# Altium PCB AOP6432.PcbDoc (part 2 of 3)
Units mm, origin at the board's own origin, x right, y up, seen from the top; angles counter-clockwise.
Board outline 64.05 x 39.02 mm, 4 copper layers (Top Layer, Layer 1, Layer 2, Bottom Layer), stack 1.52 mm thick; 112 components, 77 nets, 423 pads, 19 vias.
Unrouted connection lines stored in the file: 2.
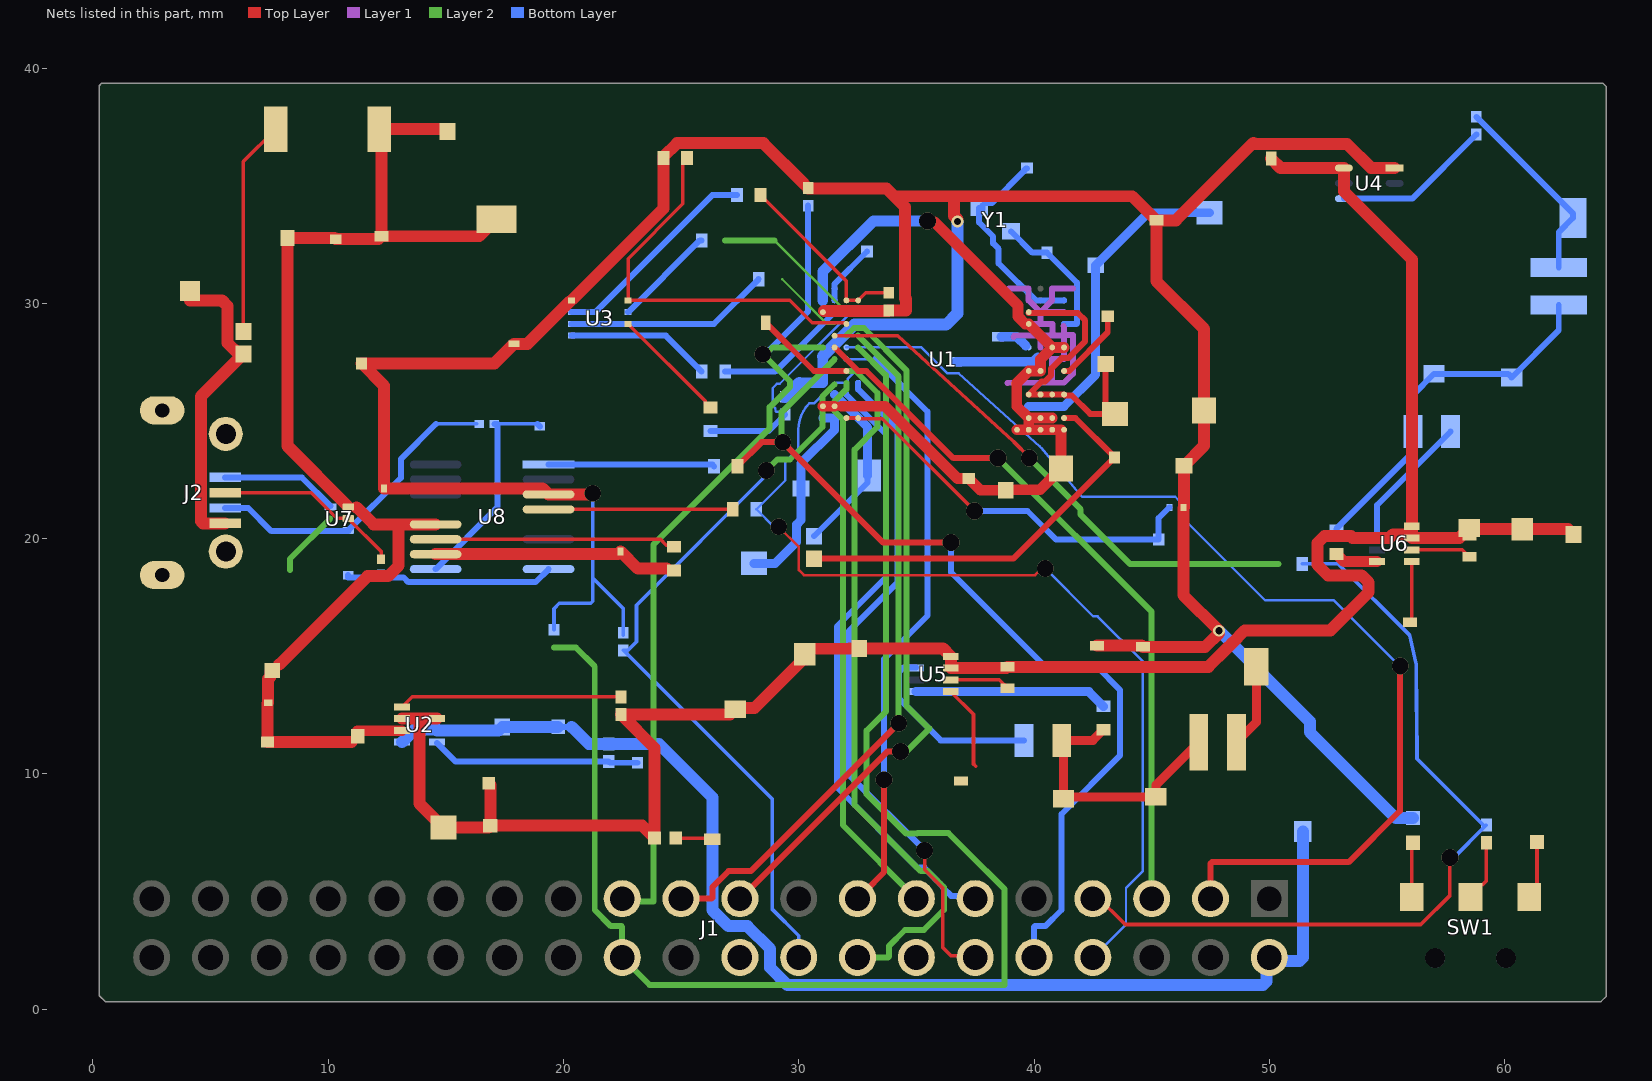
[diagram p4: the nets of this part, all layers, seen from the top]

## Part data (continued)
C25: library part CMP-06035-036920-1, "Chip Multilayer Ceramic Capacitors for General Purpose, 0603, 10uF, X7R, 15%, 20%, 10V", Case/Package=0603
C28 C44 C47 C48 C50 C53 C54: library part CMP-06035-002932-1, "Chip Multilayer Ceramic Capacitors for General Purpose, 0603, 10uF, X6S, 22%, 20%, 10V", Capacitance=10uF, Case Code (Imperial)=0603, Case Code (Metric)=1608, Dielectric=X6S, Max Operating Temperature=105°C, Min Operating Temperature=-55°C, Package Quantity=4000, Tolerance=20%, Voltage Rating=10V, Case/Package=0603, Height=0.8mm, Lead Free="Lead Free", Length=0.063inch, Material=Ceramic, Mount="Surface Mount", Packaging="Cut Tape", REACH SVHC="No SVHC", Thickness=0.031inch, Voltage Rating (DC)=10V, Width=0.031inch
C29: library part CMP-06035-045859-1, "Multi-Layer Ceramic Capacitor 10uF 10V X5R ±10% 0603 Paper T/R", Capacitance=10uF, Case Code (Imperial)=0603, Case Code (Metric)=1608, Max Operating Temperature=85°C, Min Operating Temperature=-55°C, Ratings=AEC-Q200, Tolerance=10%, Voltage Rating=10V, Case/Package=0603, Length=0.063inch, Mount="Surface Mount", Packaging="Cut Tape", Thickness=0.035inch, Width=0.031inch
C30: library part CMP-06035-037205-1, "Ceramic Capacitor for Automotive 470nF ±20% 10VDC X7S 0402 Paper T/R", Capacitance=0.47uF
C31: library part CMP-06035-016531-1, "Ceramic Capacitor for Automotive 220nF ±10% 16VDC X7R 0402 Paper T/R", Capacitance=0.22uF, Case Code (Imperial)=0402, Case Code (Metric)=1005, Dielectric=X7R, Max Operating Temperature=125°C, Min Operating Temperature=-55°C, Package Quantity=10000, Ratings=AEC-Q200, Tolerance=10%, Voltage Rating=16V, Case/Package=0402, Height=0.5mm, Lead Free="Lead Free", Length=0.039inch, Mount="Surface Mount", Packaging="Tape and Reel", Termination=SMD/SMT, Thickness=0.022inch, Voltage Rating (DC)=16V, Weight=0.000212oz, Width=0.5mm
C32: library part CMP-00260-135863763-1, Capacitance=10µF, Case/Package=0402, Dielectric=X5R, Max Operating Temperature=85°C, Min Operating Temperature=-55°C, Tolerance=20%, Voltage Rating=10V, Height=700µm, Length=1mm, Lifecycle Status=Production, Material=Ceramic, NexarPartId=135863763, Thickness=500µm, Voltage Rating (DC)=10V, Width=500µm
C33: library part CMP-2000-05255-3, "Chip Multilayer Ceramic Capacitors for General Purpose, 1206, 47uF, X5R, 15%, 20%, 10V", Capacitance=47uF, Case Code (Imperial)=1206, Case Code (Metric)=3216, Dielectric=X5R, Max Operating Temperature=85°C, Min Operating Temperature=-55°C, Package Quantity=2000, Tolerance=20%, Voltage=10V, Case/Package=1206, Depth=1.6mm, Height=1.6mm, Lead Free="Lead Free", Length=3.2mm, Mount="Surface Mount", Number of Pins=2, Packaging="Tape and Reel", Radiation Hardening=No, REACH SVHC="No SVHC", Termination=SMD/SMT, Thickness=0.071inch, Voltage Rating=10V, Voltage Rating (DC)=10V, Width=1.6mm
C34 C36 C38: library part CMP-06035-002210-1, "Chip Multilayer Ceramic Capacitors for General Purpose, 0201, 0.10uF, X5R, 15%, 20%, 16V", Capacitance=0.1uF, Dielectric=X5R, Tolerance=20%, Voltage Rating (DC)=16V, Length=600um, Thickness=300um, Width=300um
C35: "Multilayer Ceramic Capacitors MLCC - SMD/SMT 10V 10uF X5R 0402 20% Tol", Capacitance=10uF, Manufacturer_Name="Kyocera AVX", Mouser Part Number=581-0402ZD106MAT2A, Voltage=10V, Arrow Part Number=0402ZD106MAT2A, Arrow Price/Stock=https://www.arrow.com/en/products/0402zd106mat2a/avx?utm_currency=USD&region=nac, Datasheet Link=http://www.mouser.com/catalog/supplier/library/pdf/AVXSurfaceMountCeramic.pdf, Geometry.Height=0.56mm, Manufacturer_Part_Number=0402ZD106MAT2A, Mouser Price/Stock=https://www.mouser.co.uk/ProductDetail/KYOCERA-AVX/0402ZD106MAT2A?qs=sJ5gq5MLFXpDfmjiItAxIg%3D%3D
C37: library part CMP-1033-00635-3, "Chip Multilayer Ceramic Capacitors for General Purpose, 0201, 10000pF, X7R, 15%, 10%, 6.3V", Capacitance=0.01uF, Case Code (Imperial)=0201, Case Code (Metric)=0603, Dielectric=X7R, Max Operating Temperature=125°C, Min Operating Temperature=-55°C, Package Quantity=15000, Tolerance=10%, Voltage=6.3V, Case/Package=0201, Depth=0.3mm, Height=0.3mm, Lead Free="Lead Free", Length=0.6mm, Mount="Surface Mount", Packaging="Tape and Reel", Radiation Hardening=No, REACH SVHC="No SVHC", Termination=SMD/SMT, Thickness=0.013inch, Voltage Rating=6.3V, Voltage Rating (DC)=6.3V, Width=0.012inch
C40: library part CMP-08246-004330-1, "CAP CER 0.1UF 50V X7R 0402", Capacitance=100nF, Case Code (Imperial)=0402, Case Code (Metric)=1005, Max Operating Temperature=125°C, Min Operating Temperature=-55°C, Tolerance=10%, Voltage Rating=50V, Case/Package=0402, Features="Soft Termination", Length=0.039inch, Mount="Surface Mount", Packaging="Tape and Reel", RoHS Compliant=Yes, Thickness=0.024inch, Width=0.02inch
C41 C42: library part CMP-06035-059778-1, "Chip Multilayer Ceramic Capacitors for General Purpose, 0402, 2.2uF, X6S, 22%, 10%, 16V", Capacitance=2.2uF, Case/Package=0402, Max Operating Temperature=105°C, Min Operating Temperature=-55°C, Tolerance=10%, Voltage Rating=16V, Height=0.3mm, Length=0.039inch, Material=Ceramic, Mount="Surface Mount", Packaging="Tape and Reel", Thickness=0.022inch, Voltage Rating (DC)=16V, Width=0.02inch
C43: library part CMP-06035-034814-1, "Chip Multilayer Ceramic Capacitors for General Purpose, 1206, 22uF, X7R, 15%, 20%, 6.3V", Capacitance=22uF, Case/Package=1206, Dielectric=X7R, Max Operating Temperature=125°C, Min Operating Temperature=-55°C, Package Quantity=6000, Tolerance=20%, Voltage Rating=6.3V, Length=0.126inch, Mount="Surface Mount", Packaging="Tape and Reel", Thickness=0.071inch, Voltage Rating (DC)=6.3V, Weight=0.001411oz, Width=0.063inch
C45 C51: library part CMP-2006-02860-2, "Chip Multilayer Ceramic Capacitors for General Purpose, 0603, 0.47uF, X7R, 15%, 10%, 16V", Capacitance=470nF, Case Code (Imperial)=0603, Case Code (Metric)=1608, Dielectric=X7R, Max Operating Temperature=125°C, Min Operating Temperature=-55°C, Package Quantity=1, Tolerance=10%, Voltage=16V, Case/Package=0603, Depth=0.8mm, Height=0.8mm, Lead Free="Lead Free", Length=1.6mm, Material=Ceramic, Mount="Surface Mount", Number of Pins=2, Packaging="Tape and Reel", REACH SVHC="No SVHC", Termination=SMD/SMT, Thickness=0.035inch, Voltage Rating=16V, Voltage Rating (DC)=16V, Width=0.8mm
C46 C52: library part CMP-2008-04369-2, "Chip Multilayer Ceramic Capacitors for General Purpose, 0402, 470pF, C0G, 30ppm/°C, 5%, 50V", Capacitance=470pF, Case Code (Imperial)=0402, Case Code (Metric)=1005, Dielectric=C0G, Dielectric Material=Ceramic, Insulation Resistance=10GR, Max Operating Temperature=125°C, Min Operating Temperature=-55°C, Package Quantity=1, Temperature Coefficient=30ppm/°C, Tolerance=5%, Voltage=50V, Case/Package=0402, Depth=0.5mm, Height=0.5mm, Lead Free="Lead Free", Length=1mm, Material=Ceramic, Mount="Surface Mount", Number of Pins=2, Packaging="Tape and Reel", Radiation Hardening=No, REACH SVHC="No SVHC", Termination=SMD/SMT, Thickness=0.022inch, Voltage Rating=50V, Voltage Rating (DC)=50V, Width=0.5mm
C49: library part CMP-2000-06344-2, "Chip Multilayer Ceramic Capacitors for General Purpose, 1206, 47uF, X5R, 15%, 20%, 6.3V", Capacitance=47uF, Case Code (Imperial)=1206, Case Code (Metric)=3216, Dielectric=X5R, Max Operating Temperature=85°C, Min Operating Temperature=-55°C, Package Quantity=2000, Tolerance=20%, Voltage=6.3V, Case/Package=1206, Depth=1.6mm, Height=1.6mm, Lead Free="Lead Free", Length=3.2mm, Material=Ceramic, Mount="Surface Mount", Packaging="Tape and Reel", Radiation Hardening=No, REACH SVHC="No SVHC", Termination=SMD/SMT, Thickness=0.071inch, Voltage Rating=6.3V, Voltage Rating (DC)=6.3V, Width=0.063inch
C55 C56: library part CMP-06035-052402-1, "Ceramic Capacitor for Automotive 22pF  ±5% 25VDC C0G 0201 Paper T/R", Capacitance=22pF, Voltage=25V
D1: library part CMP-44529-000044-1, "LED GREEN CLEAR CHIP SMD", Case Code (Imperial)=0402, Case Code (Metric)=1005, Color=Green, Forward Current=20mA, Forward Voltage=2.1V, Lens Color=Clear, Max Operating Temperature=85°C, Min Operating Temperature=-40°C, Package Quantity=2000, Case/Package=0402, Dominant Wavelength=570nm, Height=0.6mm, Illumination Color=Green, Lead Free="Lead Free", Length=1mm, Lens Style=Clear, Luminous Intensity=50mcd, Mount="Surface Mount", Number of LEDs=1, Number of Pins=2, Packaging="Tape and Reel", Test Current=20mA, Viewing Angle=120°, Wavelength=570nm, Width=0.5mm
D2: "Schottky Diodes & Rectifiers SCHOTTKY RECT 30V 2A", Arrow Part Number=PMEG3020EP,115, Manufacturer_Name=Nexperia, Mouser Part Number=771-PMEG3020EP115, Arrow Price/Stock=https://www.arrow.com/en/products/pmeg3020ep115/nexperia?region=nac, Datasheet Link=https://assets.nexperia.com/documents/data-sheet/PMEG3020EP.pdf, Geometry.Height=1.1mm, Manufacturer_Part_Number=PMEG3020EP,115, Mouser Price/Stock=https://www.mouser.co.uk/ProductDetail/Nexperia/PMEG3020EP115?qs=GcY6OjH1zdnlY%252B06tUqEyw%3D%3D
J1: "Extra-Tall Smt Gpio Header For Raspberry Pi Hat - 2X20 Extra Tall Female Header", Manufacturer="Adafruit Industries", Category="Headers and Wire Housings", Manufacturer Part Number=2714, Pricing="1=2.95 (USD)", RoHS=Non-Compliant, Schedule B="8536694040, 8536694040|8536694040|8536694040|8536694040|8536694040", Stock=1, Supplier="Arrow Electronics", Supplier Part Number=2714
J2: "USB - micro B USB 2.0 Receptacle Connector 5 Position Surface Mount, Right Angle; Through Hole", Package=None, Check_prices=https://www.snapeda.com/parts/1050170001/Molex/view-part/?ref=eda, MF=Molex, MP=1050170001, SnapEDA_Link=https://www.snapeda.com/parts/1050170001/Molex/view-part/?ref=snap
L1 L3: library part CMP-06042-016357-2, "FIXED IND .47UH 3.0A 42MOHM"
L2 L4: library part CMP-06042-016732-1, "FIXED IND 0.1UH 4000MA INFOTMT,", RoHS Compliant=Yes
L5: library part CMP-06046-002100-1, "Chip Ferrite Bead, 0402, 30Ω @ 100MHz, 0.035Ω, 25%, 2.2A", Case Code (Imperial)=0402, Case Code (Metric)=1005, DC Resistance (DCR)=35mR, Max Current Rating=2.2A, Max Operating Temperature=125°C, Min Operating Temperature=-55°C, Ratings=AEC-Q200, Case/Package=0402, Mount="Surface Mount", Number of Lines=1, Packaging="Tape and Reel", RoHS Compliant=Yes
R1: library part CMP-2002-03033-3, Case Code (Metric)=0402, Max Operating Temperature=125°C, Max Power Dissipation=63mW, Min Operating Temperature=-55°C, Resistance=33.2, Temperature Coefficient=50ppm/°C, Tolerance=1%, Voltage Rating=50V, Case/Package=0402, Composition="Thin Film", Contact Plating=Tin, Depth=500µm, Height=350µm, Lead Free="Lead Free", Length=990.6µm, Military Standard=Not, NexarPartId=1272564, Number of Terminations=2, Packaging="Tape & Reel (TR)", Power Rating=63mW, Radiation Hardening=No, RoHS=Compliant, Voltage Rating (DC)=50V, Width=508µm
R2 R3 R4 R17 R20: library part CMP-02407-010951-1, "RES 100K OHM 1% 1/16W 0402", Case/Package=SMD/SMT, Max Operating Temperature=155°C, Min Operating Temperature=-55°C, Power Rating=62.5mW, Resistance=100k, Resistor Type="Thick Film", Temperature Coefficient=100ppm/°C, Tolerance=1%, Contact Plating=Tin, Lead Free="Lead Free", Length=1mm, Mount="Surface Mount", RoHS Compliant=Yes, Termination=Wraparound
R5 R6 R8 R9 R15 R16: library part CMP-2002-07353-1, Manufacturer="Yageo / Phycomp", Part Number=RC0402FR-0710KL
R7: library part CMP-00621-30511908-1, "RC0402FR-1047K5L General Purpose Chip Resistor Thick Film 0402 47.5kOhm 1% Paper T/R", Case/Package=0402, Resistance=47.5kΩ, Tolerance=1%, NexarPartId=30511908, Packaging="Tape & Reel", RoHS=Non-Compliant
R10 R11 R12 R13 R14: library part CMP-2002-03033-3, Case Code (Metric)=0402, Max Operating Temperature=125°C, Max Power Dissipation=63mW, Min Operating Temperature=-55°C, Resistance=33.2Ω, Temperature Coefficient=50ppm/°C, Tolerance=1%, Voltage Rating=50V, Case/Package=0402, Composition="Thin Film", Contact Plating=Tin, Depth=500µm, Height=350µm, Lead Free="Lead Free", Length=990.6µm, Military Standard=Not, NexarPartId=1272564, Number of Terminations=2, Packaging="Tape & Reel (TR)", Power Rating=63mW, Radiation Hardening=No, RoHS=Compliant, Voltage Rating (DC)=50V, Width=508µm
R18 R21 R33 R36 R37: library part CMP-03412-037830-1, "RES SMD 0 OHM JUMPER 1/16W 0402", Case Code (Imperial)=0402, Case Code (Metric)=1005, Max Operating Temperature=155°C, Max Power Dissipation=63mW, Min Operating Temperature=-55°C, Resistance=0, Resistor Type="Thick Film", Case/Package=0402, Features="Moisture Resistant", Height=0.016inch, Length=0.039inch, Number of Terminations=2, Packaging="Tape and Reel", RoHS Compliant=Yes, Width=0.02inch
R19 R22: library part CMP-02407-012458-1, "RES 18K OHM 1% 1/16W 0402", Case/Package=0402, Power Rating=63mW, Resistance=18k, Tolerance=1%, Lead Free="Lead Free", RoHS Compliant=Yes
R23: library part CMP-2004-03441-2, "RES SMD 10K OHM 0.5% 1/20W 0201", Case Code (Imperial)=0201, Case Code (Metric)=0603, Max Operating Temperature=125°C, Max Power Dissipation=50mW, Min Operating Temperature=-55°C, Package Quantity=15000, Resistance=10k, Resistor Type="Thick Film", Temperature Coefficient=50ppm/°C, Tolerance=0.5%, Voltage Rating=15V, Case/Package=0201, Depth=0.3mm, Height=0.23mm, Lead Free="Lead Free", Length=0.6mm, Military Standard=Not, Mount="Surface Mount", Number of Terminations=2, Packaging="Tape and Reel", Power Rating=50mW, Series=ERJ, Termination=SMD/SMT, Width=0.3mm
R24: library part CMP-2002-00551-1, Manufacturer=Panasonic, Part Number=ERJ-2GEJ511X
R25 R26 R30: library part CMP-02407-012085-1, "RES 10K OHM 1% 1/16W 0402", Case/Package=Molded, Max Operating Temperature=155°C, Min Operating Temperature=-55°C, Power Rating=62.5mW, Resistance=10k, Resistor Type="Thick Film", Temperature Coefficient=100ppm/°C, Tolerance=1%, Contact Plating=Tin, Lead Free="Lead Free", Length=1mm, Mount="Surface Mount", RoHS Compliant=Yes, Termination=Wraparound
R27: library part CMP-2002-07472-3, "RES 1K OHM 1% 1/16W 0402", Case Code (Imperial)=0402, Case Code (Metric)=1005, Max Operating Temperature=155°C, Max Power Dissipation=63mW, Min Operating Temperature=-55°C, Power Rating=62.5mW, Resistance=1k, Resistance Tolerance=1%, Resistor Type="Thick Film", Temperature Coefficient=100ppm/°C, Voltage Rating=50V, Case/Package=0402, Construction=Rectangular, Depth=0.5mm, Features="Moisture Resistant", Height=0.32mm, Lead Free="Lead Free", Length=1mm, Military Standard=Not, Number of Pins=2, Number of Terminations=2, Packaging="Tape and Reel", Reach SVHC Compliant=Yes, RoHS Compliant=Yes, Series=RC, Size Code=0402, Technology="THICK FILM", Termination=SMD/SMT, Tolerance=1%, Voltage Rating (DC)=50V, Width=0.5mm
R28: library part CMP-2002-08123-3, "RES Thick Film, 100kΩ, 1%, 0.063W, 100ppm/°C, 0402", Case Code (Imperial)=0402, Case Code (Metric)=1005, Max Operating Temperature=155°C, Max Power Dissipation=63mW, Min Operating Temperature=-55°C, Package Quantity=10000, Resistance=100k, Temperature Coefficient=100ppm/°C, Tolerance=1%, Voltage Rating=50V, Case/Package=0402, Composition="Thick Film", Contact Plating=Tin, Depth=0.5mm, Features="Automotive AEC-Q200", Height=0.35mm, Lead Free="Lead Free", Length=1mm, Military Standard=Not, Mount="Surface Mount", Number of Pins=2, Number of Terminations=2, Packaging="Tape and Reel", Power Rating=63mW, Radiation Hardening=No, Termination=SMD/SMT, Voltage Rating (DC)=50V, Weight=2.3E-05oz, Width=0.02inch
R29: library part CMP-2002-00224-2, "RES Thick Film, 7.87kΩ, 1%, 0.063W, 100ppm/°C, 0402", Case Code (Imperial)=0402, Case Code (Metric)=1005, Max Operating Temperature=155°C, Max Power Dissipation=63mW, Min Operating Temperature=-55°C, Package Quantity=10, Resistance=7.87k, Resistance Tolerance=1%, Resistor Type="Thick Film", Temperature Coefficient=100ppm/°C, Voltage Rating=50V, Case/Package=0402, Construction=Rectangular, Contact Plating=Tin, Depth=0.5mm, Features="Automotive AEC-Q200", Height=0.35mm, Lead Free="Lead Free", Length=1mm, Military Standard=Not, Mount="Surface Mount", Number of Pins=2, Number of Terminations=2, Packaging="Tape and Reel", Power Rating=63mW, Radiation Hardening=No, RoHS Compliant=Yes, Series=CRCW, Size Code=0402, Technology="THICK FILM", Termination=SMD/SMT, Tolerance=1%, Voltage Rating (DC)=50V, Weight=2.3E-05oz, Width=0.5mm
R31: library part CMP-2002-00237-2, "RES Thick Film, 82.5kΩ, 1%, 0.063W, 100ppm/°C, 0402", Case Code (Imperial)=0402, Case Code (Metric)=1005, Max Operating Temperature=155°C, Max Power Dissipation=63mW, Min Operating Temperature=-55°C, Package Quantity=10, Resistance=82.5k, Temperature Coefficient=100ppm/°C, Tolerance=1%, Voltage Rating=50V, Case/Package=0402, Composition="Thick Film", Contact Plating=Tin, Depth=0.5mm, Features="Automotive AEC-Q200", Height=0.35mm, Lead Free="Lead Free", Length=1mm, Military Standard=Not, Number of Terminations=2, Packaging="Tape and Reel", Power Rating=63mW, Radiation Hardening=No, Termination=SMD/SMT, Voltage Rating (DC)=50V, Weight=2.3E-05oz, Width=0.5mm
R32: library part CMP-2002-03043-1, Manufacturer="Vishay Dale", Resistance=10k, Part Number=CRCW040210K0FKEDHP
R34 R35: "No Description Available", Manufacturer_Name=Yageo, Resistance=27, Copyright="Copyright (C) 2026 Ultra Librarian. All rights reserved.", Manufacturer_Part_Number=RC0201JR-0727RL
SW1: "Slide Switch SPDT Surface Mount, Right Angle", Package=None, Digi-Key_Part_Number=401-2012-1-ND, Digi-Key_Purchase_URL=https://www.digikey.com/product-detail/en/c-k/AYZ0102AGRLC/401-2012-1-ND/1640121?utm_source=snapeda&utm_medium=aggregator&utm_campaign=symbol, MF=C&K, MP=AYZ0102AGRLC, SnapEDA_Link=https://www.snapeda.com/parts/AYZ0102AGRLC/C%26K/view-part/50616/?ref=snap
U1: "Single-chip low-power 57GHz to 63.5GHz industrial mmWave radar sensor with integrated antenna 101-FCCSP -40 to 105", Manufacturer_Name="Texas Instruments", Copyright="Copyright (C) 2026 Ultra Librarian. All rights reserved.", Manufacturer_Part_Number=XI6432BRQAAMY, RefDes=RefDes, TYPE=TYPE
U2: "1.6-V to 5.5-V, 40-mâ„", Manufacturer_Name="Texas Instruments", Copyright="Copyright (C) 2025 Ultra Librarian. All rights reserved.", Manufacturer_Part_Number=PTPS2116DRLR, RefDes=RefDes, TYPE=TYPE
U3: library part CMP-105207-000004-1, "IC FLASH 16M SPI 80MHZ 8USON", Frequency=80MHz, Max Operating Temperature=85°C, Min Operating Temperature=-40°C, Interface=SPI, Lead Free="Lead Free", Memory Type=FLASH, Packaging="Tape and Reel"
U4: library part CMP-04917-000199-1, "IC REG LINEAR 3.3V 500MA 6WSON", Dropout Voltage=238mV, Max Input Voltage=5.5V, Max Operating Temperature=125°C, Max Output Voltage=3.3V, Min Operating Temperature=-40°C, Output Current=500mA, Power Supply Rejection Ratio (PSRR)=52dB, Quiescent Current=31uA, Min Output Voltage=3.3V, Mount="Surface Mount", Number of Regulators=1, Output Configuration=Positive, Output Type=Fixed, Packaging="Tape and Reel", RoHS Compliant=Yes
U5: "2.7-V to 6-V, 2-A, adjustable-frequency, step-down converter in SOT583 package 8-SOT-5X3 -40 to 150", Manufacturer="Texas Instruments", Manufacturer Lifecycle Status=ACTIVE, Supplier Part Number=296-TPS6285020ADRLRCT-ND, Category="Voltage Regulators - Switching", ComponentLink1Description=https://sigma.octopart.com:443/184160452/technical_drawing/Texas-Instruments-TPS6285020ADRLR.pdf?src-supplier=Texas+Instruments, ComponentLink1URL=https://sigma.octopart.com:443/184160452/technical_drawing/Texas-Instruments-TPS6285020ADRLR.pdf?src-supplier=Texas+Instruments, ComponentLink2Description=https://octopart.com:443/opatz8j6/c1?t=04P0fWGL_cudllwmZINDiw2LV0UnQCBdEPC0TCiqtskBizWNZcYiud0zDodHV72PkfVAyckZwdOCP8RKkn6kOfyc1n5ayLeA0HxSBWJegEPGSGLcx5ZDwSrrVBBZMisL5iy0W6ZDyev6DYemWZv0TF3G9z2uzb8IyCt9JtlxFA4Kz3ep-HVrOA020RUMv0sDaqoO5QXkreUu2MZnPzpZ92hCZ4nlw88inlc1y5NUq3fymrAhanz4vne6D2PwE_A-BqCeNi6ywDWj7Zh3gVnmYHWucFLezg1APRGL1y_LI3b9EYi3y23IDx847xhIzfpELOnbBqVJCU5eR59dsCpX5dCCqJQSO7fhMA-LdTBewxpk-7SPURUjvrKQ9fgVnwgpJBWZzZVV-DQ&src-supplier=Texas+Instruments, ComponentLink2URL=https://octopart.com:443/opatz8j6/c1?t=04P0fWGL_cudllwmZINDiw2LV0UnQCBdEPC0TCiqtskBizWNZcYiud0zDodHV72PkfVAyckZwdOCP8RKkn6kOfyc1n5ayLeA0HxSBWJegEPGSGLcx5ZDwSrrVBBZMisL5iy0W6ZDyev6DYemWZv0TF3G9z2uzb8IyCt9JtlxFA4Kz3ep-HVrOA020RUMv0sDaqoO5QXkreUu2MZnPzpZ92hCZ4nlw88inlc1y5NUq3fymrAhanz4vne6D2PwE_A-BqCeNi6ywDWj7Zh3gVnmYHWucFLezg1APRGL1y_LI3b9EYi3y23IDx847xhIzfpELOnbBqVJCU5eR59dsCpX5dCCqJQSO7fhMA-LdTBewxpk-7SPURUjvrKQ9fgVnwgpJBWZzZVV-DQ&src-supplier=Texas+Instruments, ComponentLink3Description=https://sigma.octopart.com:443/182665545/technical_drawing/Texas-Instruments-TPS6285020ADRLR.pdf?src-supplier=Texas+Instruments, ComponentLink3URL=https://sigma.octopart.com:443/182665545/technical_drawing/Texas-Instruments-TPS6285020ADRLR.pdf?src-supplier=Texas+Instruments, ComponentLink4Description=https://sigma.octopart.com:443/158891806/technical_drawing/Texas-Instruments-TPS6285020ADRLR.pdf?src-supplier=Texas+Instruments, ComponentLink4URL=https://sigma.octopart.com:443/158891806/technical_drawing/Texas-Instruments-TPS6285020ADRLR.pdf?src-supplier=Texas+Instruments, ComponentLink5Description=http://sigma.octopart.com:80/reach_statement/Texas-Instruments-company-64.pdf?src-supplier=Compliance+Statements, ComponentLink5URL=http://sigma.octopart.com:80/reach_statement/Texas-Instruments-company-64.pdf?src-supplier=Compliance+Statements, ComponentLink6Description=http://sigma.octopart.com:80/conflict_mineral_statement/Texas-Instruments-company-63.pdf?src-supplier=Compliance+Statements, ComponentLink6URL=http://sigma.octopart.com:80/conflict_mineral_statement/Texas-Instruments-company-63.pdf?src-supplier=Compliance+Statements, Height=0m, Length=2.1mm, Lifecycle Status=Production, Manufacturer Part Number=TPS6285020ADRLR, Pins=8, Pricing="1=1.52, 10=1.11, 25=1.0072, 100=0.8944, 250=0.8406, 500=0.80822, 1000=0.78154 (USD)", RoHS=Compliant, Stock=3967, Supplier=DigiKey, Thickness=550µm, Topology=Buck, Width=1.2mm
U6: "2.7-V to 6-V, 2-A, adjustable-frequency, step-down converter in SOT583 package 8-SOT-5X3 -40 to 150", Manufacturer="Texas Instruments", Manufacturer Lifecycle Status=ACTIVE, Supplier Part Number=296-TPS6285020MDRLRCT-ND, Category="Voltage Regulators - Switching", ComponentLink1Description=https://sigma.octopart.com:443/184160452/technical_drawing/Texas-Instruments-TPS6285020MDRLR.pdf?src-supplier=Texas+Instruments, ComponentLink1URL=https://sigma.octopart.com:443/184160452/technical_drawing/Texas-Instruments-TPS6285020MDRLR.pdf?src-supplier=Texas+Instruments, ComponentLink2Description=https://octopart.com:443/opatz8j6/c1?t=j3yBvK7Knh4WlWv-GCmcuFftOO46dSNwGQl-vghnWa4P5FbmLUGqZNdsGfaa2BRR46_Y1nzoe2qF8sMvCt876JOyEgPizEtcT2yvP1vZQytL7fg4rcnOrOugqRiKWn0286UeK7FulRXUg4pTSKccoaKiJwsZgYKIRxgW7j4fAHRZJY4lsJ0ZDv8xhLvzrIp2Pcb8cqxZC7ty7vl1hVH_WtJZr1qIj67qX8542lWXUQdjGQKeDgJuvlZqR-rHtLmJKlwkQEL8PBADkijrD9-u13OcaRMmMNay04XWwwbZoMmW1KE4hF6cOnWV_RA-QnpXjrLeXbxdYo-tweympHrjh5YqTTZaQriQ9CqmxVDrh805T_blsE6klgcM7lXPiTRjw5KW9wlzXuU&src-supplier=Texas+Instruments, ComponentLink2URL=https://octopart.com:443/opatz8j6/c1?t=j3yBvK7Knh4WlWv-GCmcuFftOO46dSNwGQl-vghnWa4P5FbmLUGqZNdsGfaa2BRR46_Y1nzoe2qF8sMvCt876JOyEgPizEtcT2yvP1vZQytL7fg4rcnOrOugqRiKWn0286UeK7FulRXUg4pTSKccoaKiJwsZgYKIRxgW7j4fAHRZJY4lsJ0ZDv8xhLvzrIp2Pcb8cqxZC7ty7vl1hVH_WtJZr1qIj67qX8542lWXUQdjGQKeDgJuvlZqR-rHtLmJKlwkQEL8PBADkijrD9-u13OcaRMmMNay04XWwwbZoMmW1KE4hF6cOnWV_RA-QnpXjrLeXbxdYo-tweympHrjh5YqTTZaQriQ9CqmxVDrh805T_blsE6klgcM7lXPiTRjw5KW9wlzXuU&src-supplier=Texas+Instruments, ComponentLink3Description=https://sigma.octopart.com:443/182665545/technical_drawing/Texas-Instruments-TPS6285020MDRLR.pdf?src-supplier=Texas+Instruments, ComponentLink3URL=https://sigma.octopart.com:443/182665545/technical_drawing/Texas-Instruments-TPS6285020MDRLR.pdf?src-supplier=Texas+Instruments, ComponentLink4Description=https://sigma.octopart.com:443/158891806/technical_drawing/Texas-Instruments-TPS6285020MDRLR.pdf?src-supplier=Texas+Instruments, ComponentLink4URL=https://sigma.octopart.com:443/158891806/technical_drawing/Texas-Instruments-TPS6285020MDRLR.pdf?src-supplier=Texas+Instruments, ComponentLink5Description=https://datasheet.octopart.com:443/TPS6285020MDRLR-Texas-Instruments-datasheet-190364767.pdf?src-supplier=LCSC, ComponentLink5URL=https://datasheet.octopart.com:443/TPS6285020MDRLR-Texas-Instruments-datasheet-190364767.pdf?src-supplier=LCSC, ComponentLink6Description=http://sigma.octopart.com:80/reach_statement/Texas-Instruments-company-64.pdf?src-supplier=Compliance+Statements, ComponentLink6URL=http://sigma.octopart.com:80/reach_statement/Texas-Instruments-company-64.pdf?src-supplier=Compliance+Statements, ComponentLink7Description=http://sigma.octopart.com:80/conflict_mineral_statement/Texas-Instruments-company-63.pdf?src-supplier=Compliance+Statements, ComponentLink7URL=http://sigma.octopart.com:80/conflict_mineral_statement/Texas-Instruments-company-63.pdf?src-supplier=Compliance+Statements, Height=0m, Length=2.1mm, Lifecycle Status=Production, Manufacturer Part Number=TPS6285020MDRLR, Pins=8, Pricing="1=1.52, 10=1.11, 25=1.0072, 100=0.8944, 250=0.8406, 500=0.80822, 1000=0.78154 (USD)", RoHS=Compliant, Stock=2434, Supplier=DigiKey, Thickness=550µm, Topology=Buck, Width=1.2mm
U7: library part CMP-0326-00024-3, "ESD-Protection Array for High-Speed Data Interfaces, 4 Channels, -40 to +85 degC, 6-pin SON (DRY), Green (RoHS & no Sb/Br)", Breakdown Voltage(Min)(V)=6, IO Capacitance(Typ)(pF)=1.6, IO Leakage Current(nA)=1, Manufacturer="Texas Instruments", 1394 / Firewire=TRUE, ComponentLink1Description="Manufacturer URL", ComponentLink1URL=http://www.ti.com/, ComponentLink2Description=Datasheet, ComponentLink2URL=http://www.ti.com/general/docs/lit/getliterature.tsp?genericPartNumber=TPD4E004&fileType=pdf, ComponentLink3Description="URL Link1", ComponentLink3URL=SamplesURL:http://www.ti.com/product/tpd4e004#samples, DatasheetVersion=SLVS729A, Eco-Plan="Green (RoHS & no Sb/Br)", IEC 61000-4-2 Air-Gap(+/- kV)=12, IEC 61000-4-2 Contact(+/- kV)=8, Mounting Technology="Surface Mount", PackageDescription="6-Pin Plastic Small Outline No-Lead, 1 x 1.45 x 0.6 mm Body, 0.5 mm Pitch", PackageReference=DRY0006A, PackageVersion="revF, Dec-2011", PartNumber=TPD4E004DRYR, Serial ATA / eSATA=TRUE, SubFamily="ESD Solution", USB High Speed=TRUE
U8: library part CMP-0248-00026-3, "IC USB SERIAL BASIC UART 16SSOP", Case/Package=SSOP, Max Operating Temperature=85°C, Max Supply Voltage=5.5V, Min Operating Temperature=-40°C, Min Supply Voltage=2.97V, Operating Supply Current=8mA, Operating Supply Voltage=5V, Package Quantity=3000, Data Rate=12Mbps, Height=0.059inch, Interface=UART, Length=5mm, Mount="Surface Mount", Number of Channels=1, Number of Pins=16, Packaging="Tape and Reel", Weight=0.004586oz, Width=0.157inch
Y1: "Crystal, 40MHZ, 8PF, SMD, 2MM X 1.6MM;", Manufacturer=Murata, Supplier Part Number=490-XRCGB40M000F1S2GR0CT-ND, Category=Crystals, ComponentLink1Description=http://sigma.octopart.com:80/reach_statement/Murata-company-16.pdf?src-supplier=Compliance+Statements, ComponentLink1URL=http://sigma.octopart.com:80/reach_statement/Murata-company-16.pdf?src-supplier=Compliance+Statements, Manufacturer Part Number=XRCGB40M000F1S2GR0, Pricing="1=0.31, 10=0.273, 25=0.2584, 50=0.2478, 100=0.2376, 250=0.22472, 500=0.21544, 1000=0.20652 (USD)", Stock=3900, Supplier=DigiKey

## Via types
v1: diameter 0.711, hole 0.711, Top Layer to Bottom Layer, 17 vias
v2: diameter 0.5, hole 0.3, Top Layer to Bottom Layer, 2 vias

## Nets (pads, with @x,y where several pads share a name; then routed paths per layer and width w, separated by ;. In a path a pad name is that pad's centre, name@x,y a point inside that pad or via, vN(x,y) a via of type N, cw(c..) or ccw(c..) an arc to the next point about the centre after c; other vN are vias at no path point)
1V2_FB: R18.1 U5.5 | length 8.2
  Bottom Layer w0.381: U5.5@34.985,13.496 42.329,13.496 R18.1@42.95,12.875
1V8_FB: R21.1 U6.5 | length 1.9
  Top Layer w0.457: R21.1@52.85,19.35 53.175,19.025 U6.5@54.575,19.025
5V_IN: C23.1 C24.1 C25.1 C42.1 C44.1 C45.1 C46.1 C50.1 C51.1 C52.1 R17.1 R20.1 R24.2 R25.1 U2.2 U2.7 U4.6 U5.1 U5.2 U6.1 U6.2 | length 93.5
  Top Layer w0.152: C24.1@16.818,7.725 C24.1@16.893,7.8 ; C23.1@16.825,9.6 C23.1@16.893,9.532 ; C44.1@27.074,12.524 C44.1@27.3,12.75 ; R17.1@38.821,14.496 R17.1@38.875,14.55 ; C50.1@58.5,20.45 C50.1@58.548,20.402 ; C52.1@62.702,20.402 C52.1@62.925,20.179
  Top Layer w0.508: U2.7@13.145,12.35 13.885,12.35 ; U2.2@14.625,12.35 13.885,12.35 ; C24.1@16.818,7.725 C25.1@14.9,7.725 13.885,8.74 13.885,12.35 ; C23.1@16.893,9.532 C24.1@16.893,7.8 23.35,7.8 R24.2@23.875,7.275 23.875,11.099 R25.1@22.45,12.524 C44.1@27.074,12.524 ; C44.1@27.3,12.75 27.357,12.807 28.13,12.807 30.176,14.853 C45.1@30.323,14.853 ; C45.1@30.25,15.078 30.452,15.28 30.475,15.304 32.154,15.329 C46.1@32.575,15.329 36.132,15.329 U5.1@36.465,14.996 U5.2@36.465,14.496 R17.1@38.821,14.496 ; R17.1@38.875,14.55 47.407,14.55 48.18,15.323 48.417,15.56 48.957,16.1 52.602,16.1 54.224,17.722 54.224,18.143 53.927,18.441 52.491,18.441 52.042,18.89 52.042,19.81 52.34,20.108 53.468,20.108 53.542,20.034 55.109,20.034 55.258,20.183 56.055,20.183 U6.1@56.055,20.525 56.055,31.87 53.169,34.756 U4.6@53.169,35.75 50.475,35.75 C42.1@50.075,36.15 ; U6.2@56.055,20.025 58.075,20.025 58.338,20.288 C50.1@58.5,20.45 ; C50.1@58.548,20.402 C51.1@60.75,20.402 C52.1@62.702,20.402
5V_REG: C21.1 C22.1 C28.1 J1.2 R26.2 U2.3 U2.5 | length 52.9
  Bottom Layer w0.254: C22.1@17.25,11.85 C22.1@17.4,12 ; C21.1@19.771,12 C21.1@19.775,12.004 20.35,12.004 ; J1.2@49.875,2.075 J1.2@50,2.2 J1.2@50.155,2.045
  Bottom Layer w0.508: U2.5@13.145,11.35 13.676,11.881 U2.3@14.625,11.881 ; U2.3@14.625,11.85 C22.1@17.25,11.85 ; C22.1@17.4,12 C21.1@19.771,12 ; 20.35,12.004 21.077,11.276 R26.2@21.925,11.276 24.06,11.276 26.331,9.005 26.331,8.169 26.331,4.216 27.016,3.531 27.821,3.531 28.784,2.568 28.784,1.763 29.516,1.031 49.726,1.031 49.875,1.18 J1.2@49.875,2.075 ; J1.2@50.155,2.045 51.276,2.045 51.425,2.193 C28.1@51.425,7.55
FT230_VCC: C26.1 C27.1 C30.1 C31.1 C32.1 C33.1 C35.2 C36.1 C37.1 D2.1 U2.6 U7.6 U8.12 | length 51.5
  Top Layer w0.152: C36.1@7.425,12.996 C36.1@7.454,13.025 ; C35.2@7.625,14.4 7.869,14.644 C35.2@7.919,14.644 ; C31.1@10.274,32.776 C31.1@10.325,32.725 ; U7.6@10.86,21.35 10.88,21.33 11.213,21.33 ; C26.1@11.004,11.35 C26.1@11.25,11.596 C26.1@11.25,11.83 ; C32.1@12.15,32.725 C32.1@12.275,32.85 ; D2.1@12.175,37.4 D2.1@12.275,37.3 ; U2.6@13.125,11.83 U2.6@13.145,11.85 ; C27.1@14.975,37.4 C27.1@15.075,37.3
  Top Layer w0.457: C26.1@11.25,11.83 U2.6@13.125,11.83
  Top Layer w0.508: C36.1@7.425,12.996 C37.1@7.425,11.35 C26.1@11.004,11.35 ; C36.1@7.454,13.025 7.454,14.036 7.554,14.136 7.554,14.334 7.62,14.4 C35.2@7.625,14.4 ; C35.2@7.919,14.644 11.681,18.406 12.552,18.406 13,18.854 13,20.608 ; C31.1@10.274,32.776 C30.1@8.275,32.776 8.275,23.935 U7.6@10.86,21.35 ; C31.1@10.325,32.725 C32.1@12.15,32.725 ; 11.213,21.33 11.935,20.608 13,20.608 ; D2.1@12.175,37.4 C27.1@14.975,37.4 ; D2.1@12.275,37.3 C32.1@12.275,32.85 16.424,32.85 C33.1@17.15,33.576 ; U8.12@14.569,20.608 13,20.608
FT230_VCCIO: C15.1 C16.1 C34.1 C39.1 C40.1 C41.1 R3.1 R4.1 R5.1 R6.1 R7.2 R8.2 R9.2 R16.1 R23.2 R29.2 U1.C1 U1.J1 U3.8 U4.1 U8.3 | length 136.9
  Top Layer w0.152: U3.8@20.276,30.076 20.28,30.08 20.305,30.08 U3.8@20.35,30.125 20.375,30.125 20.424,30.174 U3.8@20.424,30.199 ; v1@21.203,21.878 v1(21.25,21.925) ; R7.2@24.25,36.175 R7.2@24.25,36.225 ; R5.1@30.226,35.074 30.251,35.074 30.4,34.925 R5.1@30.4,34.9 ; U1.C1@31.024,29.625 U1.C1@31.069,29.67 ; 31.675,34.875 31.676,34.876 ; R8.2@33.825,29.67 R8.2@33.825,29.7 ; 34.525,30.208 34.55,30.183 ; v2(36.75,33.475) v2@36.75,33.569 ; R3.1@44.575,15.45 R3.1@44.625,15.4 ; R23.2@46.35,21.296 R23.2@46.379,21.325 ; v2@47.865,15.991 v2(47.865,16.085) ; 49.325,36.825 49.37,36.78
  Top Layer w0.508: U3.8@20.276,30.076 18.475,28.275 C40.1@17.9,28.275 17.071,27.446 C39.1@11.425,27.446 12.375,26.496 C34.1@12.375,22.129 19.117,22.129 U8.3@19.369,21.878 v1@21.203,21.878 ; U3.8@20.424,30.199 24.25,34.025 R7.2@24.25,36.175 ; R7.2@24.25,36.225 24.83,36.805 28.495,36.805 R5.1@30.226,35.074 ; R5.1@30.4,34.875 31.675,34.875 ; U1.C1@31.069,29.67 R8.2@33.825,29.67 ; 31.676,34.876 33.739,34.876 34.065,34.55 ; R8.2@33.825,29.7 34.55,29.7 34.55,30.183 ; 34.525,30.208 34.525,34.09 34.065,34.55 ; v2@36.75,33.569 36.6,33.719 36.6,34.55 ; R4.1@42.675,15.45 R3.1@44.575,15.45 ; R3.1@44.625,15.4 47.273,15.4 v2@47.865,15.991 ; R23.2@46.35,21.296 46.35,17.6 v2(47.865,16.085) ; R23.2@46.379,21.325 C15.1@46.379,23.1 47.225,23.946 C16.1@47.225,25.449 47.225,28.914 45.2,30.939 C41.1@45.2,33.525 ; 49.325,36.825 46.025,33.525 C41.1@45.2,33.525 ; 49.37,36.78 53.296,36.78 54.326,35.75 U4.1@55.325,35.75 ; 34.065,34.55 36.6,34.55 ; 36.6,34.55 44.175,34.55 C41.1@45.2,33.525
  Bottom Layer w0.152: R6.1@19.6,16.125 19.6,17.025 19.825,17.25 21.161,17.25 21.25,17.339 21.25,18.325 ; v1(21.25,21.925) 21.25,18.325 ; R16.1@22.55,15.9 R16.1@22.55,16 22.55,17.025 21.25,18.325
  Bottom Layer w0.457: 30.025,26.625 31.024,26.625 31.024,27.749
  Bottom Layer w0.508: R9.2@29.425,26.025 30.025,26.625 ; 31.024,27.749 32.368,29.093 36.268,29.093 36.75,29.575 v2(36.75,33.475) ; v2(47.865,16.085) 51.724,12.226 51.724,11.776 55.375,8.125 R29.2@56.1,8.125
FT_3V3OUT: C38.1 R33.2 U8.10 | length 10.2
  Top Layer w0.508: U8.10@14.569,19.338 22.316,19.338 C38.1@22.432,19.454 23.162,18.725 24.375,18.725
FT_RESETN: R33.1 U8.11 | length 9.9
  Top Layer w0.152: U8.11@14.569,19.973 24.127,19.973 24.375,19.725
GND: C1.2 C2.2 C3.2 C4.2 C5.2 C6.2 C7.2 C8.2 C9.2 C10.2 C11.2 C12.2 C13.2 C14.2 C15.2 C16.2 C17.2 C18.2 C19.2 C20.2 C21.2 C22.2 C23.2 C24.2 C25.2 C26.2 C27.2 C28.2 C29.2 C30.2 C31.2 C32.2 C33.2 C34.2 C35.1 C36.2 C37.2 C38.2 C39.2 C40.2 C41.2 C42.2 C43.2 C44.2 C45.2 C46.2 C47.2 C48.2 C49.2 C50.2 C51.2 C52.2 C53.2 C54.2 C55.2 C56.2 D1.1 J1.14 J1.20 J2.5 J2.SH1 J2.SH2 J2.SH3 J2.SH4 J2.SH5 J2.SH6 R2.2 R19.2 R22.2 R28.1 R31.1 R32.1 U1.A1 U1.A3 U1.A4 U1.A5 U1.A6 U1.A7 U1.A9 U1.A10 U1.B7 U1.B9 U1.C8 U1.C9 U1.C10 U1.D8 U1.D9 U1.E1 U1.E7 U1.E8 U1.E9 U1.E10 U1.F8 U1.G9 U1.G10 U1.H1 U1.H9 U1.J7 U1.J8 U1.J9 U1.J10 U1.N1 U1.N3 U1.N4 U1.N5 U2.1 U3.4 U3.9 U4.3 U4.7 U5.8 U6.8 U7.3 U8.5 U8.13 Y1.2 Y1.4 | length 17.8
  Layer 1 w0.254: 38.88,26.619 38.886,26.625 U1.J7@39.777,26.625 U1.J8@40.277,26.625 U1.J9@40.777,26.625 U1.J10@41.277,26.625 41.656,27.004 41.656,28.661 41.312,28.661 U1.E10@41.277,28.625 ; 38.898,30.577 38.945,30.625 U1.A6@39.277,30.625 39.774,30.625 39.774,30.125 U1.C8@40.274,29.625 ; 39.125,28.575 39.175,28.625 U1.E7@39.777,28.625 U1.E8@40.274,28.625 ; 39.824,29.022 39.928,29.125 U1.D8@40.274,29.125 ; U1.F8@40.274,28.125 U1.E8@40.274,28.625 ; U1.J9@40.774,26.625 40.774,27.625 41.274,27.625 41.277,27.627 U1.E10@41.277,28.625 ; U1.A9@40.774,30.625 40.774,30.125 U1.C8@40.274,29.625 ; U1.A9@40.777,30.625 U1.A10@41.277,30.625 41.665,30.625 ; 41.244,29.035 41.277,29.003 U1.E10@41.277,28.625 ; U1.E10@41.274,28.625 U1.E9@40.777,28.625 ; U1.C10@41.274,29.625 U1.C8@40.274,29.625 ; U1.E8@40.274,28.625 U1.E9@40.777,28.625 ; U1.D8@40.274,29.125 U1.C8@40.274,29.625 ; U1.D8@40.274,29.125 U1.D8@40.277,29.125 U1.D9@40.777,29.125 U1.E9@40.777,28.625
GPADC1: C20.1 R27.2 U1.M10 | length 17.4
  Top Layer w0.254: R27.2@30.65,19.146 39.118,19.146 C20.1@43.425,23.454 41.754,25.125 U1.M10@41.274,25.125
NetC1_1: C1.1 R23.1 U1.M3 U1.M4 | length 17
  Top Layer w0.152: U1.M3@32.024,25.125 32.551,25.125 32.575,25.101 33.549,25.101 v1(37.475,21.175)
  Bottom Layer w0.254: v1(37.475,21.175) 39.725,21.175 40.943,19.957 C1.1@45.3,19.957 45.3,20.875 R23.1@45.75,21.325
NetC9_1: C9.1 U1.D10 Y1.3 | length 6
  Bottom Layer w0.254: Y1.3@39.02,33.06 39.93,32.15 C9.1@40.55,32.15 41.825,30.875 41.825,29.15 41.8,29.125 U1.D10@41.274,29.125
NetC10_1: C10.1 U1.B10 Y1.1 | length 8.9
  Bottom Layer w0.254: Y1.1@37.67,34.06 37.67,33.435 38.264,32.841 38.264,32.552 38.5,32.316 38.5,31.691 40.066,30.125 U1.B10@41.274,30.125 ; Y1.1@37.812,33.979 37.812,34.157 37.918,34.263 38.223,34.263 39.566,35.606 39.566,35.641 39.661,35.736 C10.1@39.696,35.736
NetC55_1: C55.1 R34.2 U8.8 | length 8.9
  Bottom Layer w0.254: C55.1@10.85,18.45 10.85,18.356 13.206,18.356 13.412,18.149 18.816,18.149 U8.8@19.369,18.703
NetC56_1: C56.1 R35.2 U8.9 | length 9.2
  Bottom Layer w0.152: R35.2@17.194,24.875 C56.1@18.896,24.875
  Bottom Layer w0.254: U8.9@14.569,18.703 17.194,21.328 17.194,24.875 R35.2@17.067,24.875 ; C56.1@18.896,24.875 C56.1@18.996,24.775
NetD1_2: D1.2 R24.1 | length 1.6
  Top Layer w0.152: R24.1@24.775,7.275 26.275,7.275 D1.2@26.325,7.225
NetD2_2: D2.2 L5.2 | length 9.2
  Top Layer w0.152: L5.2@6.4,28.804 6.4,36.025 D2.2@7.775,37.4
NetJ1_3: J1.3 U1.F3 | length 46.1
  Top Layer w0.102: 47.5,6.19 47.56,6.25
  Top Layer w0.254: J1.3@47.5,4.7 47.5,6.19 ; 47.56,6.25 53.375,6.25 55.55,8.425 55.55,14.572 v1(55.561,14.584)
  Bottom Layer w0.102: U1.F3@32.024,28.125 35.219,28.125 36.324,27.02 36.805,27.02 40.244,23.919 cw(c39.801,23.428) 40.309,23.851 41.985,21.84 42.045,21.78 42.087,21.78 46.001,21.78 46.182,21.599 46.182,21.018 49.825,17.375 52.75,17.375 55.155,14.97 55.215,14.91 v1(55.561,14.584)
NetJ1_5: J1.5 U1.F2 | length 30.3
  Top Layer w0.254: U1.F2@31.527,28.125 32.527,27.125 32.873,27.125 36.575,23.423 v1(38.471,23.423)
  Layer 2 w0.254: v1(38.471,23.423) 45,16.894 J1.5@45,4.7
NetJ1_7: J1.7 R1.2 R30.1 | length 35.7
  Top Layer w0.152: J1.7@42.453,4.826 J1.7@42.626,4.826 ; J1.7@42.5,4.7 J1.7@42.626,4.826 ; J1.7@42.637,5.222 42.637,4.838 J1.7@42.626,4.826 ; v1(57.675,6.45) 57.675,4.833 56.442,3.6 43.875,3.6 42.649,4.826 J1.7@42.626,4.826
  Bottom Layer w0.152: R1.2@51.4,18.925 52.93,18.925 55.975,15.88 56.231,14.733 cw(c55.561,14.584) 56.247,14.589 56.277,10.649 R30.1@59.162,7.764 ; v1(57.675,6.45) 57.848,6.45 R30.1@59.162,7.764 ; R30.1@59.225,7.827 R30.1@59.162,7.764
NetJ1_8: J1.8 R3.2 R37.1 U1.H4 | length 41.4
  Top Layer w0.102: v1(29.15,20.5) 30.009,19.641 30.009,18.662 30.221,18.45 40.046,18.45 40.329,18.733 v1(40.483,18.733)
  Bottom Layer w0.102: v1(29.15,20.5) 28.95,20.5 R37.1@28.2,21.25 29.434,22.484 29.434,23.275 29.986,23.826 29.986,24.629 cw(c31.571,24.629) 30.45,25.75 30.649,25.75 31.524,26.625 32.024,26.625 32.092,26.693 32.092,26.804 32.345,27.057 32.416,27.057 32.484,27.125 U1.H4@32.524,27.125 ; v1(40.483,18.733) 42.52,16.696 42.704,16.696 44.625,14.775 R3.2@44.625,14.5 44.625,5.87 43.907,5.153 43.907,3.607 J1.8@42.5,2.2
NetJ1_10: J1.10 R4.2 R36.1 U1.G2 | length 39.4
  Top Layer w0.254: R36.1@27.4,23.075 28.425,24.1 v1(29.325,24.1) 33.593,19.832 v1(36.475,19.832)
  Layer 2 w0.254: v1(29.325,24.1) 29.275,24.15 29.275,25.376 U1.G2@31.524,27.625
  Bottom Layer w0.254: v1(36.475,19.832) 36.475,18.563 40.488,14.55 R4.2@42.675,14.55 43.65,13.575 43.65,10.775 41.169,8.294 41.169,4.216 40.484,3.531 40.038,3.531 40,3.493 J1.10@40,2.2
NetJ1_11: J1.11 U1.K3 | length 26.1
  Bottom Layer w0.254: U1.K3@32.024,26.125 33.7,24.449 33.7,18.35 31.625,16.275 31.625,9.433 35.045,6.013 35.339,6.013 35.826,5.526 36.007,5.346 36.007,5.327 36.125,5.209 36.125,5.175 36.48,4.82 37.38,4.82 J1.11@37.5,4.7
NetJ1_12: J1.12 U1.J4 | length 28.8
  Top Layer w0.152: v1(35.35,6.75) 35.35,5.931 36.125,5.156 36.125,2.622 36.472,2.275 37.425,2.275 J1.12@37.5,2.2
  Bottom Layer w0.254: U1.J4@32.524,26.625 32.524,26.343 34.208,24.66 34.208,18.14 32.133,16.065 32.133,9.967 v1(35.35,6.75)
NetJ1_13: J1.13 U1.J3 | length 23.6
  Layer 2 w0.254: U1.J3@32.024,26.625 32.024,26.341 31.518,25.835 31.518,25.415 31.872,25.061 31.872,7.828 J1.13@35,4.7
NetJ1_15: J1.15 U1.G3 | length 26.3
  Top Layer w0.102: J1.15@32.5,4.7 J1.15@32.8,5
  Top Layer w0.254: J1.15@32.8,5 33.625,5.825 v1(33.625,9.75)
  Bottom Layer w0.102: U1.G3@32.024,27.625 32.03,27.631 33.239,27.631 ; 33.294,27.576 33.305,27.588
  Bottom Layer w0.254: 33.239,27.631 33.294,27.576 35.475,25.395 35.475,16.725 33.625,14.875 v1(33.625,9.75)
NetJ1_16: J1.16 U1.H2 | length 31.1
  Layer 2 w0.254: U1.H2@31.524,27.125 32.414,27.125 33.35,26.189 33.35,24.75 32.38,23.78 32.38,8.678 35.19,5.869 35.484,5.869 36.169,5.184 36.169,4.216 35.321,3.369 34.516,3.369 33.831,2.684 33.831,2.238 33.793,2.2 J1.16@32.5,2.2
NetJ1_18: J1.18 R16.2 U1.J2 | length 31.6
  Layer 2 w0.254: v1(28.625,22.9) 29.088,23.363 29.63,23.363 31.01,24.744 31.01,26.045 U1.J2@31.514,26.549
  Bottom Layer w0.152: v1(28.625,22.9) 28.625,22.692 23.105,17.172 23.105,15.613 22.742,15.25 R16.2@22.55,15.25 28.882,8.918 28.882,4.237 30,3.119 J1.18@30,2.2
NetJ1_19: J1.19 U1.E3 | length 30.1
  Top Layer w0.254: J1.19@27.5,4.7 27.518,4.7 33.768,10.95 v1(34.325,10.95)
  Layer 2 w0.254: U1.E3@32.024,28.625 32.349,28.95 32.775,28.95 34.575,27.15 34.575,12.9 35.55,11.925 34.575,10.95 v1(34.325,10.95)
NetJ1_21: J1.21 U1.E4 | length 29.8
  Top Layer w0.254: J1.21@25,4.7 26.293,4.7 26.331,4.738 26.331,5.184 27.016,5.869 27.969,5.869 v1(34.25,12.15)
  Layer 2 w0.254: U1.E4@32.524,28.625 34.25,26.899 v1(34.25,12.15)
NetJ1_23: J1.23 R5.2 U1.F1 | length 37.4
  Layer 2 w0.254: J1.23@22.5,4.7 22.625,4.575 23.831,4.575 23.831,19.756 28.767,24.692 28.767,25.586 29.635,26.454 29.635,26.676 28.487,27.825 v1@28.475,27.825 ; v1(28.475,27.837) 28.599,27.837 28.887,28.125 U1.F1@31.024,28.125
  Bottom Layer w0.254: v1(28.475,27.837) 28.573,27.837 30.4,29.664 R5.2@30.4,34.15
NetJ1_24: J1.24 R6.2 U1.F4 | length 63.3
  Layer 2 w0.254: R6.2@19.6,15.375 20.525,15.375 21.331,14.569 21.331,4.216 22.016,3.531 22.462,3.531 22.5,3.493 J1.24@22.5,2.2 23.668,1.031 38.75,1.031 38.75,5.103 37.984,5.869 37.981,5.869 36.363,7.487 35.045,7.487 35.033,7.475 34.55,7.475 32.888,9.137 32.888,11.838 33.7,12.65 33.7,26.949 U1.F4@32.524,28.125
NetJ2_2: J2.2 R35.1 U7.4 | length 13.4
  Bottom Layer w0.152: 14.586,24.875 R35.1@16.305,24.875
  Bottom Layer w0.254: J2.2@5.625,21.3 6.607,21.3 7.588,20.319 U7.4@10.86,20.319 ; U7.4@10.86,20.35 13.088,22.578 13.088,23.377 14.586,24.875
NetJ2_3: J2.3 R34.1 U7.5 | length 7.9
  Top Layer w0.152: J2.3@5.625,21.95 9.286,21.95 10.366,20.87 10.84,20.87 U7.5@10.86,20.85 12.25,19.46 R34.1@12.25,19.194
NetJ2_4: J2.4 U7.1 | length 5
  Bottom Layer w0.254: J2.4@5.625,22.6 8.886,22.6 U7.1@10.105,21.381
NetR1_1: R1.1 U1.E2 | length 22.9
  Top Layer w0.152: U1.E2@31.524,28.625 34.2,28.625 39.119,24.138 39.121,24.138 39.153,24.106 39.801,23.458 v1(39.801,23.428)
  Layer 2 w0.254: v1(39.801,23.428) 41.982,21.248 41.982,21.018 44.075,18.925 R1.1@50.4,18.925
NetR2_1: R2.1 U1.H3 | length 4.3
  Top Layer w0.254: R2.1@28.6,29.175 30.65,27.125 U1.H3@32.024,27.125
NetR7_1: R7.1 U1.D3 U3.1 | length 16.8
  Top Layer w0.152: R7.1@25.25,36.175 25.076,36.001 25.076,34.226 22.75,31.899 U3.1@22.75,30.125 29.614,30.125 30.569,29.17 31.979,29.17 U1.D3@32.024,29.125
NetR8_1: R8.1 R14.1 U1.B3 U1.B4 | length 8
  Top Layer w0.152: R14.1@28.375,34.6 28.375,34.55 28.549,34.376 28.599,34.376 32.024,30.951 32.024,30.125 32.524,30.125 32.849,30.45 R8.1@33.825,30.45
NetR9_1: R9.1 R13.1 U1.C4 | length 9.9
  Bottom Layer w0.102: R9.1@29.306,25.394 29.042,25.394 29.037,25.4 29.014,25.422 29.008,25.536 28.895,25.649 28.895,26.401 29.074,26.58 29.197,26.58 32.243,29.625 32.524,29.625 U1.C4@32.529,29.625
  Bottom Layer w0.254: R13.1@26.25,24.575 28.725,24.575 R9.1@29.425,25.275 R9.1@29.306,25.394
NetR10_1: R10.1 U1.D2 | length 3
  Layer 2 w0.102: R10.1@29.3,31.025 31.2,29.125 U1.D2@31.524,29.125
NetR10_2: R10.2 U3.6 | length 8.7
  Bottom Layer w0.254: U3.6@20.35,29.125 26.4,29.125 R10.2@28.3,31.025
NetR11_1: R11.1 U1.C2 | length 5.7
  Bottom Layer w0.254: R11.1@26.875,27.1 28.999,27.1 U1.C2@31.518,29.619
NetR11_2: R11.2 U3.5 | length 6.2
  Bottom Layer w0.254: U3.5@20.35,28.625 24.35,28.625 R11.2@25.875,27.1
NetR12_1: R12.1 U1.C3 | length 6.4
  Layer 2 w0.102: 28.974,32.675 U1.C3@32.024,29.625
  Layer 2 w0.254: R12.1@26.875,32.675 28.974,32.675
NetR12_2: R12.2 U3.2 | length 4.4
  Bottom Layer w0.254: U3.2@22.75,29.625 25.8,32.675 R12.2@25.875,32.675
NetR13_2: R13.2 U3.3 | length 5
  Top Layer w0.152: U3.3@22.75,29.125 22.775,29.125 22.824,29.076 22.824,29.051 26.026,25.849 26.026,25.749 26.2,25.575 R13.2@26.25,25.575
NetR14_2: R14.2 U3.7 | length 9.1
  Bottom Layer w0.254: U3.7@20.35,29.625 21.35,29.625 26.325,34.6 R14.2@27.375,34.6
NetR17_2: R17.2 U5.3 | length 2.6
  Top Layer w0.152: U5.3@36.465,13.996 38.529,13.996 R17.2@38.875,13.65
NetR19_1: R19.1 U5.4 | length 3.6
  Top Layer w0.152: U5.4@36.465,13.496 37.43,12.531 37.43,10.42 37.525,10.325
NetR20_2: R20.2 U6.3 | length 2.6
  Top Layer w0.152: U6.3@56.055,19.525 58.2,19.525 R20.2@58.5,19.225
NetR22_1: R22.1 U6.4 | length 2.6
  Top Layer w0.152: R22.1@55.975,16.45 56.055,16.53 U6.4@56.055,19.025
NetR30_2: R30.2 SW1.2 | length 2.6
  Top Layer w0.152: SW1.2@58.55,4.775 58.55,4.875 58.974,5.299 59.074,5.299 59.225,5.45 R30.2@59.225,7.075
NetR32_2: R32.2 U7.2 | length 2.9
  Layer 2 w0.254: R32.2@8.375,18.675 8.375,19.135 U7.2@10.09,20.85
NetR36_2: R36.2 U8.1 | length 7.1
  Bottom Layer w0.254: U8.1@19.369,23.148 26.328,23.148 R36.2@26.4,23.075
NetR37_2: R37.2 U8.4 | length 7.8
  Top Layer w0.152: U8.4@19.369,21.243 27.193,21.243 R37.2@27.2,21.25
RADAR_1P2_RF: C18.1 C19.1 U1.L7 U1.L8 U1.L9 U1.L10 | length 13.8
  Bottom Layer w0.381: U1.L7@39.774,25.625 40.274,25.625 40.774,25.625 41.274,25.625 42.621,26.972 C18.1@42.621,31.615 44.856,33.85 C19.1@47.449,33.85
RADAR_1V2: C17.1 R27.1 U1.K2 | length 7.5
  Bottom Layer w0.254: R27.1@30.65,20.104 32.925,22.378 C17.1@32.925,22.675
  Bottom Layer w0.381: U1.K2@31.524,26.125 32.925,24.725 C17.1@32.925,22.675
RADAR_1V4_APLL: C6.1 U1.G8 | length 3.5
  Bottom Layer w0.406: C6.1@36.7,27.525 39.975,27.525 40.15,27.7
RADAR_1V4_SYNTH: C7.1 U1.F7 | length 1.2
  Bottom Layer w0.406: C7.1@38.6,28.575 39.275,28.575 39.65,28.2
RADAR_1V8: C2.1 C3.1 C4.1 U1.B1 U1.D7 U1.F9 U1.F10 U1.H7 U1.H8 U1.L1 U1.L2 U1.M7 U1.M8 U1.M9 U1.N6 U1.N7 U1.N8 U1.N9 U1.N10 | length 36.2
  Top Layer w0.152: C3.1@38.8,22.054 39.029,22.054 C3.1@39.05,22.075 ; 39.63,29.125 U1.D7@39.774,29.125 ; 41.15,24.501 41.274,24.625 41.15,24.625
  Top Layer w0.254: U1.L2@31.524,25.625 31.809,25.625 31.815,25.631 ; C3.1@38.812,22.284 C3.1@38.813,22.289
  Top Layer w0.457: U1.L1@31.024,25.625 U1.L2@31.524,25.625 ; 31.815,25.631 33.666,25.631 36.747,22.55 C2.1@37.229,22.55 37.725,22.054 C3.1@38.8,22.054 ; v1(35.475,33.5) 35.524,33.451 35.774,33.451 39.319,29.906 39.319,29.436 39.63,29.125 ; C3.1@39.05,22.075 40.25,22.075 C4.1@41.15,22.975 41.15,24.501 ; U1.N6@39.274,24.625 U1.N7@39.774,24.625 ; U1.D7@39.774,29.125 U1.F9@40.774,28.125 ; U1.M9@40.774,25.125 U1.M7@39.774,25.125 ; 41.15,24.625 U1.N7@39.774,24.625 ; U1.F10@41.274,28.125 U1.F9@40.774,28.125 ; U1.N7@39.774,24.625 U1.M7@39.774,25.125 ; U1.M7@39.774,25.125 39.268,25.631 39.268,26.619 39.774,27.125 40.274,27.125 40.274,27.625 U1.F9@40.774,28.125
  Bottom Layer w0.457: U1.B1@31.024,30.125 31.024,31.349 33.175,33.5 v1(35.475,33.5)
RADAR_1V_RF_OUT: C13.1 C14.1 U1.C7 U1.K7 U1.K8 U1.K9 U1.K10 | length 13.3
  Top Layer w0.152: U1.C7@39.774,29.58 U1.C7@39.774,29.625 ; U1.K10@41.274,26.125 U1.K10@41.319,26.08 ; C14.1@43.046,25.703 C14.1@43.449,25.3
  Top Layer w0.254: U1.C7@39.774,29.58 41.87,29.58 42.175,29.275 42.175,28.382 41.463,27.67 41.175,27.67 40.731,27.226 40.731,26.936 40.464,26.668 40.317,26.668 39.774,26.125 40.774,26.125 U1.K10@41.274,26.125 ; U1.K10@41.319,26.08 41.604,26.08 42.384,25.3 C14.1@43.449,25.3 ; C14.1@43.046,25.703 C13.1@43.046,27.425
RADAR_SRAM_1V2: C11.1 C12.1 U1.M1 U1.M2 U1.N2 | length 8.6
  Bottom Layer w0.254: U1.N2@31.518,24.631 U1.N2@31.524,24.625 ; U1.M2@31.518,25.125 U1.M2@31.524,25.125
  Bottom Layer w0.381: C12.1@28.101,18.95 29,18.95 29.914,19.864 29.914,20.6 30.096,20.783 C11.1@30.096,22.125 30.096,23.197 U1.N2@31.524,24.625 ; U1.M1@31.024,25.125 31.518,25.125 U1.N2@31.518,24.631
RADAR_VBGAP: C5.1 U1.H10 | length 3.2
  Top Layer w0.254: U1.H10@41.274,27.125 41.493,27.125 43.133,28.766 C5.1@43.133,29.45
REG_1V2: C43.1 L2.2 | length 3.6
  Top Layer w0.381: L2.2@48.6,11.35 49.45,12.2 C43.1@49.45,14.55
REG_1V8: C49.1 L4.2 R15.1 | length 8.3
  Bottom Layer w0.254: R15.1@58.8,37.925 62.901,33.824 C49.1@62.901,33.625 62.3,33.024 L4.2@62.3,31.525
REG_OUT_1V2: C47.1 C48.1 L1.2 L2.1 R18.2 | length 11.5
  Top Layer w0.152: L1.2@41.175,11.425 L1.2@41.25,11.35 ; C47.1@41.25,8.95 C47.1@41.325,9.025
  Top Layer w0.381: L1.2@41.175,11.425 42.5,11.425 R18.2@42.95,11.875 ; C47.1@41.25,8.95 L1.2@41.25,11.35 ; C47.1@41.325,9.025 C48.1@45.175,9.025 45.175,9.525 L2.1@47,11.35
REG_OUT_1V8: C53.1 C54.1 L3.2 L4.1 R21.2 | length 15.6
  Bottom Layer w0.254: R21.2@52.85,20.35 52.85,20.418 56.1,23.668 L3.2@56.1,24.55 56.1,26.1 C53.1@57,27 60.15,27 C54.1@60.3,26.85 62.3,28.85 L4.1@62.3,29.925
SOP0_H: R29.1 SW1.1 | length 2.3
  Top Layer w0.152: SW1.1@56.05,4.775 56.05,7.025 R29.1@56.1,7.075
SOP0_L: R31.2 SW1.3 | length 2.5
  Top Layer w0.152: SW1.3@61.05,4.775 61.375,5.1 R31.2@61.375,7.1
SW2: L1.1 U5.7 | length 8
  Bottom Layer w0.254: U5.7@34.985,14.527 34.452,14.527 34.269,14.344 34.269,13.188 36.032,11.425 L1.1@39.575,11.425
SW3: L3.1 U6.7 | length 5.8
  Bottom Layer w0.254: U6.7@54.575,20.025 54.575,21.425 L3.1@57.7,24.55
SW_PR1: R26.1 R28.2 U2.4 | length 8.9
  Bottom Layer w0.254: U2.4@14.625,11.319 15.42,10.524 R26.1@21.925,10.524 21.974,10.475 R28.2@23.148,10.475
SW_ST: R25.2 U2.8 | length 9.5
  Top Layer w0.152: U2.8@13.145,12.85 13.571,13.276 R25.2@22.45,13.276
TP10: C8.1 U1.A2 U1.B2 | length 2.6
  Bottom Layer w0.254: U1.B2@31.524,30.131 31.524,30.824 C8.1@32.9,32.2
USB_VBUS: C29.1 J2.1 L5.1 | length 13.5
  Top Layer w0.152: L5.1@6.196,27.846 L5.1@6.4,27.846
  Top Layer w0.508: C29.1@4.125,30.524 4.125,30.121 5.493,30.121 5.734,29.88 5.734,28.309 L5.1@6.196,27.846 ; J2.1@5.625,20.65 4.684,20.65 4.595,20.739 4.595,26.041 L5.1@6.4,27.846
VCC_3V3_ENABLE: R15.2 U4.4 | length 6.8
  Bottom Layer w0.254: U4.4@53.169,34.45 56.075,34.45 R15.2@58.8,37.175